# EAGLE board uClouds_SE_Front_Panel (EAGLE 9.5.2)
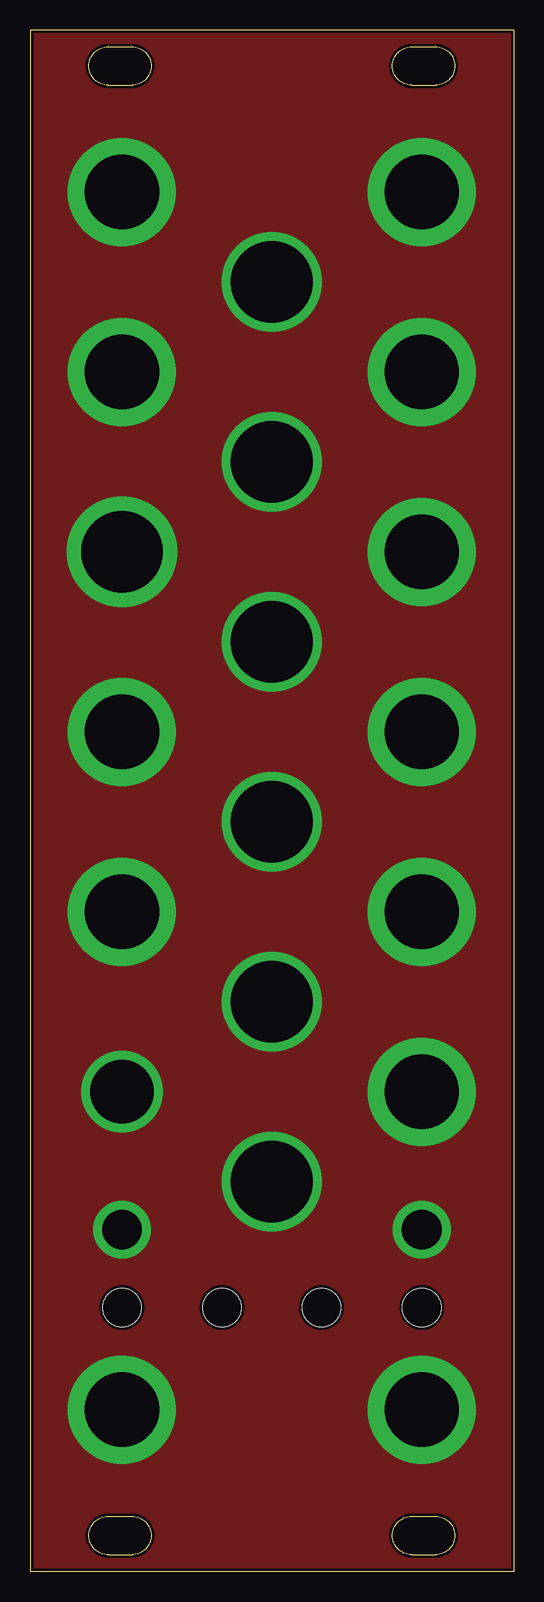
[diagram p0: board, top side]
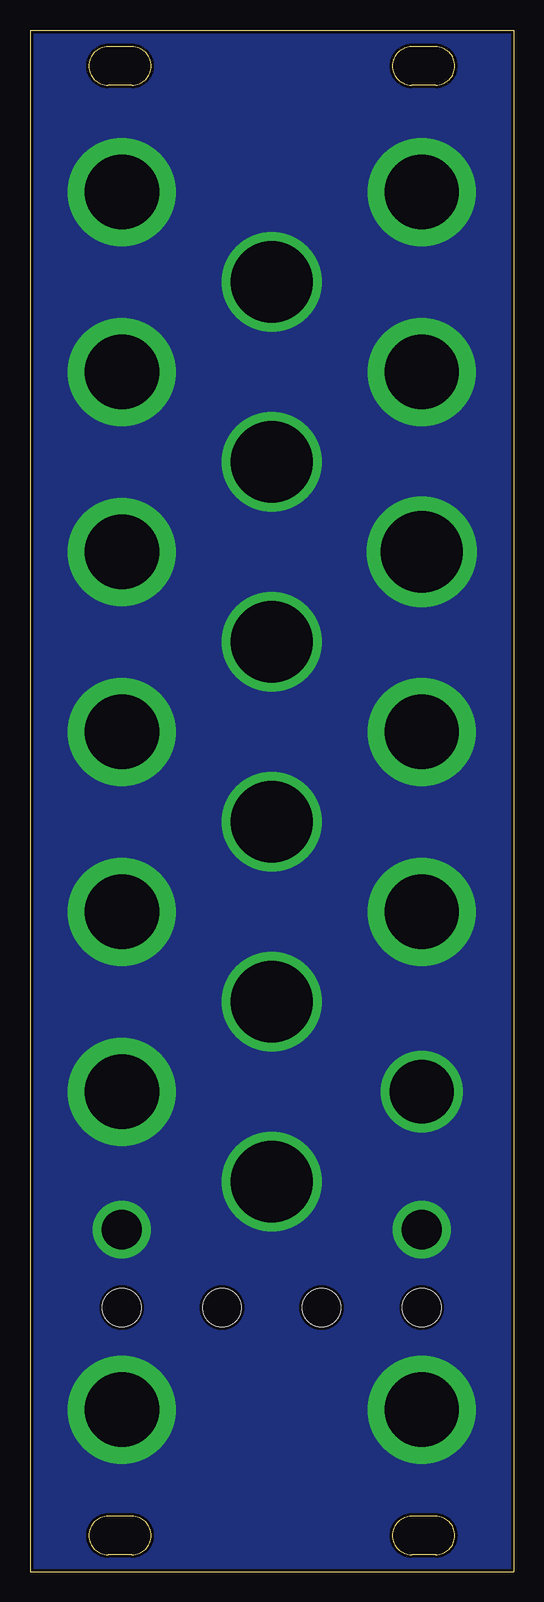
[diagram p1: board, bottom side, seen from below]

Size 40.3 x 128.5 mm. Coordinates in mm from the lower left corner, seen from the top.
Outline: 40.3,128.5 0,128.5 0,0 40.3,0 40.3,128.5
Outline: 6.5,123.9 arc-180 6.5,127.1 8.5,127.1 arc-180 8.5,123.9 6.5,123.9
Outline: 6.5,1.4 arc-180 6.5,4.6 8.5,4.6 arc-180 8.5,1.4 6.5,1.4
Outline: 31.8,1.4 arc-180 31.8,4.6 33.8,4.6 arc-180 33.8,1.4 31.8,1.4
Outline: 31.8,123.9 arc-180 31.8,127.1 33.8,127.1 arc-180 33.8,123.9 31.8,123.9
Copper layers (1*16): Top 0.035mm / dielectric 1.5mm / Bottom 0.035mm
Design rules "default *": minimum track width 10mil, minimum drill 24mil, track to track 8mil, track to pad 8mil, pad to pad 8mil, via to via 8mil, smd to smd 8mil, copper to edge 0.25mm, drill to drill 8mil, minimum pad ring 6mil, minimum via ring 6mil, stop-mask expansion 0mil, vias tented up to drill 0mil, thermal gap 10mil
Holes 3.2 mm at 7.65,22 16,22 32.65,22 24.3,22

## Placement (x,y rotation side)
E$3  [NEG-OUT-L]  15.15,13.5 0 top
E$4  [NEG-OUT-R]  25.15,13.5 0 top

## Library data of the parts
E$3 E$4 = uClouds_SE_Library

## Tracks (layer width: path | path; a pad name or v marks a point on that pad's centre or on a via)
GND1  (via drill 3.3 pad 4.8, 5.3 pad 6.8, 6.2 pad 9, 6.8 pad 8.3, 6.8 pad 9.2)
  other vias: 20.15,107.5 20.15,92.5 20.15,77.5 20.15,62.5 20.15,32.5 32.65,100 32.65,85 32.65,70 32.65,55 32.65,115 20.15,47.5 32.65,13.5 7.65,13.5 7.65,85 7.65,70 7.65,40 7.65,28.5 7.65,115 32.65,40 7.65,55 7.65,100 32.65,28.5
  pour Top (no thermals): 0,128.5 40.3,128.5 40.3,0 0,0
  pour Bottom (no thermals): 0,128.5 40.3,128.5 40.3,0 0,0

## Text on the board
tStop: TD-UCSE-D | CC BY-SA 4.0 | tall-dog.com | POS | IN L | DENS | IN R | SIZE | IN GAIN | TEXT | TRIG | PITCH | FREEZE | BLEND | MODE | MEMORY | μClouds | SE
bStop: µClouds SE / Front Panel / TD-UCSE-D-FP/B / CC BY-SA 4.0 / 2019-12-13 / tall-dog.com | Panel / derived / from work by / Émilie Gillet / of Mutable / Instruments